# Altium PCB reciever_v1.PcbDoc
Units mm, origin at the board's own origin, x right, y up, seen from the top; angles counter-clockwise.
Board outline 22 x 75 mm, 2 copper layers (Top Layer, Bottom Layer); 27 components, 25 nets, 193 pads, 38 vias.
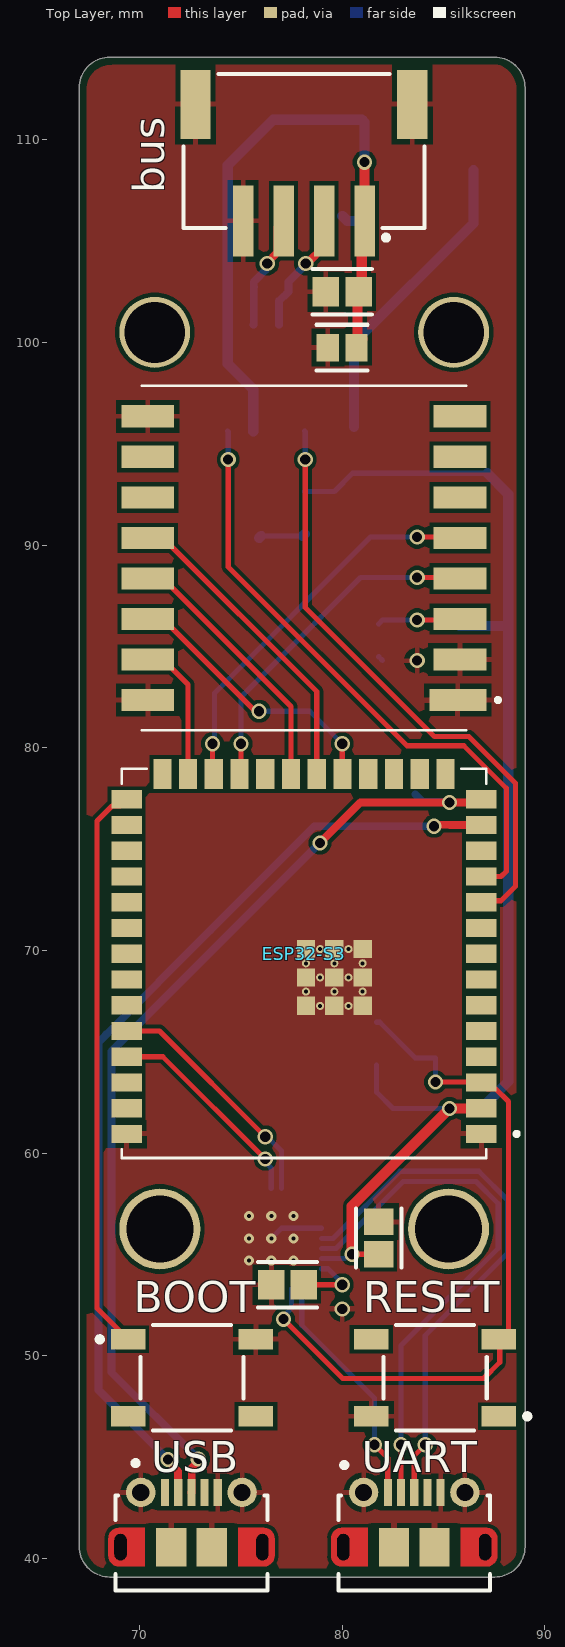
[diagram p0: Top Layer view]
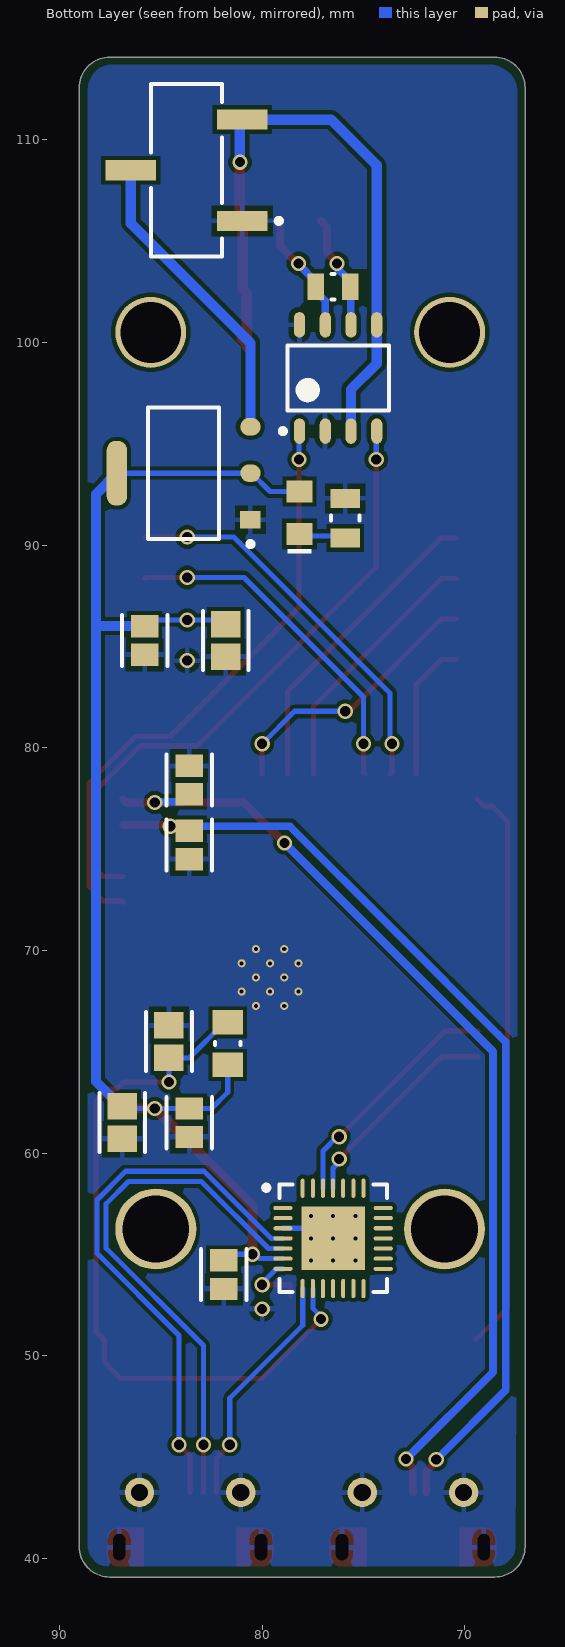
[diagram p1: Bottom Layer view, seen from below]
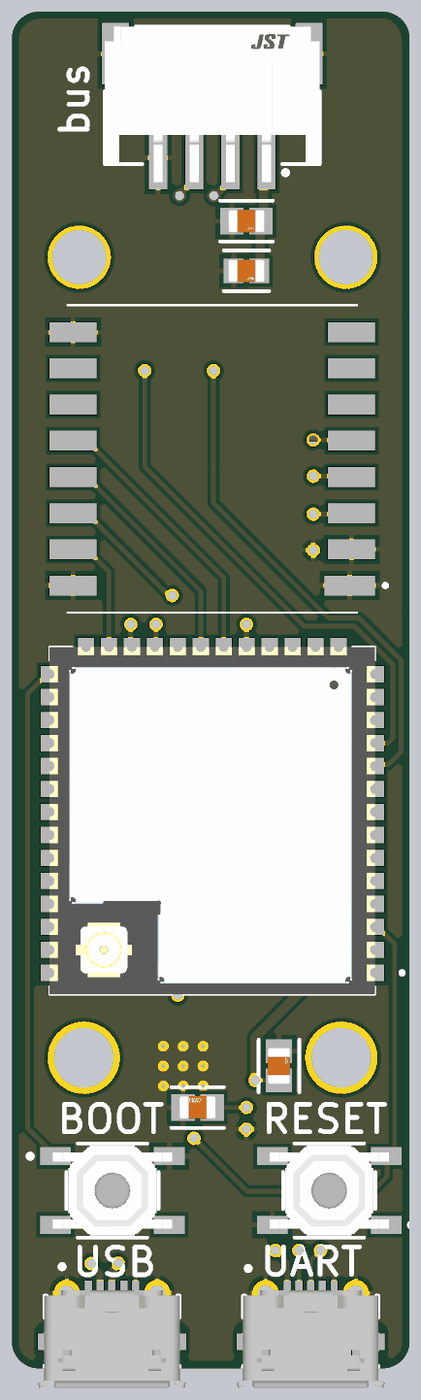
[diagram p2: 3D render of the assembled board from above, using the file's embedded part models]
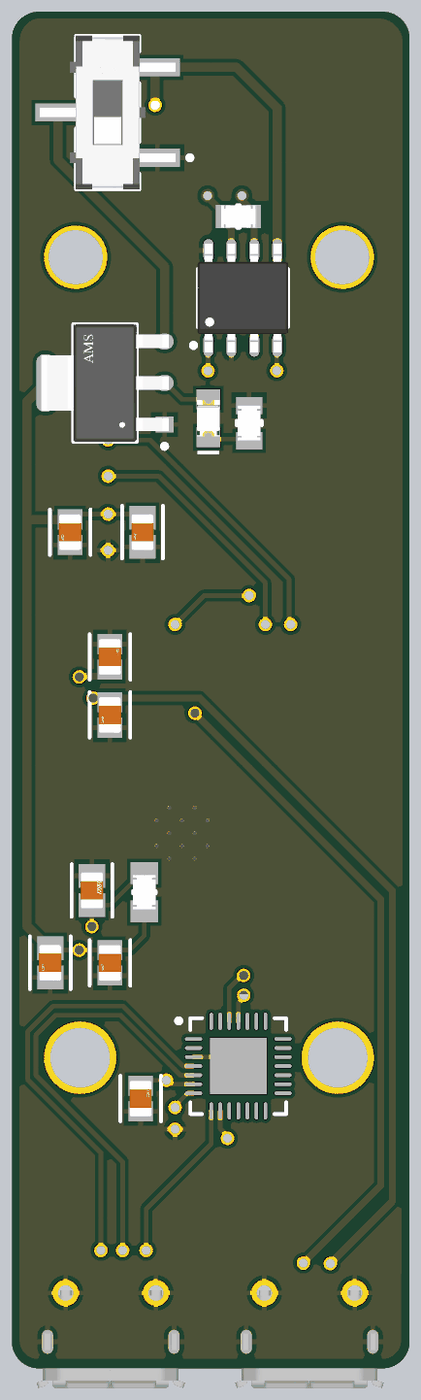
[diagram p3: 3D render of the assembled board from below, using the file's embedded part models]

## Layer stack, top to bottom
Top Solder: solder mask 0.0102, Solder Resist, Dk 3.5
Top Layer: signal copper 0.0356
Dielectric 1: dielectric 0.32, FR-4, Dk 4.8
Bottom Layer: signal copper 0.0356
Bottom Solder: solder mask 0.0102, Solder Resist, Dk 3.5

## Board outline
67.025,40.575 67.025,112.575 cw(c68.525,112.575) 68.525,114.075 87.525,114.075 cw(c87.525,112.575) 89.025,112.575 89.025,40.575 cw(c87.525,40.575) 87.525,39.075 68.525,39.075 cw(c68.525,40.575)

## Design rules (kind name [scope] priority, off if disabled: settings)
Clearance [All] p1: gap=0.2 ignorepadtopadclearanceinfootprint=TRUE
DiffPairsRouting [All] p1: maxlimit=0.254 minlimit=0.254 mostfreqgap=0.254 toplayer_minwidth=0.381 toplayer_maxwidth=0.381 toplayer_prefwidth=0.381 bottomlayer_minwidth=0.381 bottomlayer_maxwidth=0.381 bottomlayer_prefwidth=0.381 maxuncoupledlength=12.7
HoleSize [All] p1: absolutevalues=TRUE maxlimit=6.3 minlimit=0.2 maxpercent=80.000 minpercent=20.000
MinimumSolderMaskSliver [All] p1: minsoldermaskwidth=0.05
PolygonConnect [All] p1: connectstyle=Relief reliefconductorwidth=0.254 reliefentries=4 polygonreliefangle="90 Angle" airgapwidth=0.254
RoutingVias [All] p1: holewidth=0.711 width=1.27 viastyle="Through Hole" minholewidth=0.3 minwidth=0.4 maxholewidth=0.711 maxwidth=1.27
SilkToSolderMaskClearance [IsPad] p1: minsilkscreentomaskgap=0.15 clearancetoexposedcopper=TRUE
SolderMaskExpansion [All] p1: expansion=0.05 istentingtop=FALSE
SupplyNets "Schematic Supply Nets" [InNet('GND')] p1: voltage=0.000
Width [All] p1: maxlimit=0.508 minlimit=0.254 preferedwidth=0.254
26 further rules are at their usual default settings.

## Classes and differential pairs
component class reciever_v1: BOOT bus RESET UART
differential pair CAN: +CAN_+ -CAN_-
differential pair D: +D_+ -D_-

## Components (designator, comment, footprint, x,y, rotation, side; value= is the part's Value field where it differs from the comment)
BOOT "IO0" FP-8-1437565-1-MFG 72.585,48.907 r0 top
bus "S4B-PH-SM4-TB" FP-S4B-PH-SM4-TB-MFG 78.11,109.45 r0 top
C1 "0.1uF" FP-0805-L_2_01_0_2-W_1_25-IPC_C 83.6,61.494 r270 bottom
C2 "22uF" FP-0805-L_2_01_0_2-W_1_25-IPC_B 86.9,61.5 r270 bottom
C3 "22uF" FP-0805-L_2_01_0_2-W_1_25-IPC_B 81.8,85.3 r270 bottom
C4 "0.1uF" FP-0805-L_2_01_0_2-W_1_25-IPC_C 85.8,85.3 r270 bottom
C5 "1uF" FP-0805-L_2_01_0_2-W_1_25-IPC_B 84.6,65.5 r90 bottom
C6 "0.1uF" FP-0805-L_2_01_0_2-W_1_25-IPC_C 83.6,78.406 r90 bottom
C7 "0.1uF" FP-0805-L_2_01_0_2-W_1_25-IPC_C 83.6,75.2 r270 bottom
C8 "1uF" FP-0805-L_2_01_0_2-W_1_25-IPC_B 77.3,53.5 r180 top
C9 "22uF" FP-0805-L_2_01_0_2-W_1_25-IPC_B 81.8,55.8 r90 top
C10 "0.1uF" FP-0805-L_2_01_0_2-W_1_25-IPC_C 81.9,53.994 r90 bottom
C11 "0.1uF" FP-0805-L_2_01_0_2-W_1_25-IPC_C 80,99.75 r0 top
C12 "22uF" FP-0805-L_2_01_0_2-W_1_25-IPC_B 80,102.5 r0 top
CAN_controller "TJA1051T/3,118" NXP-SOIC-8_L 76.25,98.25 r90 bottom
CP2102 "CP2102-GMR" SLAB-QFN-28-3125x3125TP_M 76.5,55.787 r180 bottom
D_PWR "150080BS75000" WL-SMCW_0805_150080xx75000 78.155,91.6 r90 bottom
ESP32-S3 "ESP32-S3-WROOM-1U-N16R8" XCVR_ESP32-S3-WROOM-1U-N16R8 78.11,69.354 r180 top
LDO "AMS1117-3.3" FP-AMS1117-IPC_C 83.875,93.55 r0 bottom
LoRa "RA-02_LORA" MODULE_RA-02_LORA 78.11,89.355 r180 top
R1 "10k" FP-CRCW0805-e3-IPC_A 81.7,65.4 r90 bottom
R2 "1k" FP-CRCW0805-e3-MFG 75.9,91.33 r90 bottom
Rcan "CRCW0805120RFKEA" FP-CRCW0805-e3-IPC_C 76.5,102.75 r180 bottom
RESET "EN" FP-8-1437565-1-MFG 84.582,48.907 r180 top
SW_PWR "JS102011SCQN" FP-JS102011SCQN-MFG 83.729,108.5 r90 bottom
UART "105017-0001" USB-MICRO-B_V 83.555,41.9 r0 top
USB "105017-0001" USB-MICRO-B_V 72.56,41.9 r0 top (schematic designator "USB micro B")

## Footprints (in the part's own frame and the unit in brackets; to place one, negate y for a bottom-side part, rotate by r counter-clockwise, add the part's x,y. Pads: shape width x height; smd on the part's side, far side on the other; paste and mask are expansions set on the pad)
FP-8-1437565-1-MFG [mm]
  rect 1.7x1 smd paste+0 mask+0: 1(-3.15,1.9) 2(3.15,1.9) 3(-3.15,-1.9) 4(3.15,-1.9)
  silkscreen extent -4.67,-2.6 2.55,2.6, body extent -4.1,-2.7 4.1,2.7, height 0.25
FP-0805-L_2_01_0_2-W_1_25-IPC_B [mm]
  rect 1.305x1.456 smd paste+0 mask+0: 1(-0.806,0) 2(0.806,0)
  silkscreen extent -1.46,-1.13 1.46,1.13, body extent -1,-0.63 1,0.63, height 1.52
FP-0805-L_2_01_0_2-W_1_25-IPC_C [mm]
  rect 1.105x1.356 smd paste+0 mask+0: 1(-0.706,0) 2(0.706,0)
  silkscreen extent -1.26,-1.12 1.26,1.12, body extent -1,-0.63 1,0.63, height 0.94
FP-AMS1117-IPC_C [mm]
  rect 1.004x0.872 smd paste+0 mask+0: 1(-3.295,2.29)
  rrect100% 1.004x0.872 smd paste+0 mask+0: 2(-3.295,0) 3(-3.295,-2.29)
  rrect87% 1.004x3.182 smd paste+0 mask+0: 4(3.295,0)
  silkscreen extent -3.42,-3.25 1.75,3.62, body extent -3.53,-3.25 3.53,3.25, height 1.8
FP-CRCW0805-e3-IPC_A [mil]
  rect 47.5x59.38 smd paste+0 mask+0: 1(-41.37,0) 2(41.37,0)
  silkscreen extent -3,-25 3,25, body extent -39,-25 39,25, height 20
FP-CRCW0805-e3-IPC_C [mil]
  rect 31.75x51.5 smd paste+0 mask+0: 1(-33.5,0) 2(33.5,0)
  silkscreen extent -3,-25 3,25, body extent -39,-25 39,25, height 20
FP-CRCW0805-e3-MFG [mm]
  rect 0.95x1.45 smd paste+0 mask+0: 1(-0.975,0) 2(0.975,0)
  silkscreen extent -0.13,-0.7 0.13,0.7, body extent -1,-0.63 1,0.63, height 0.5
FP-JS102011SCQN-MFG [mm]
  rect 1x2.5 smd paste+0 mask+0: 1(-2.5,-2.75) 2(0,2.75) 3(2.5,-2.75)
  silkscreen extent -4.25,-4.67 4.25,1.75, body extent -4.25,-3.75 4.25,3.75, height 5.5
FP-S4B-PH-SM4-TB-MFG [mm]
  rect 1x3.5 smd: 1(3,-3.45) 2(1,-3.45) 3(-1,-3.45) 4(-3,-3.45)
  rect 1.5x3.4 smd: 5(-5.35,2.3) 6(5.35,2.3)
  silkscreen extent -5.95,-4.4 5.95,3.8, body extent -6.2,-5.3 6.2,4.1, height 0.25
MODULE_RA-02_LORA [mm]
  rect 2.8x1.1 smd: 1(-7.6,7)
  rect 2.6x1.1 smd: 2(-7.7,5) 3(-7.7,3) 4(-7.7,1) 5(-7.7,-1) 6(-7.7,-3) 7(-7.7,-5) 8(-7.7,-7) 9(7.7,-7) 10(7.7,-5) 11(7.7,-3) 12(7.7,-1) 13(7.7,1) 14(7.7,3) 15(7.7,5) 16(7.7,7)
  silkscreen extent -9.68,-8.5 8,8.5
NXP-SOIC-8_L [mm] "SOIC, 8-Leads, Body 5x4mm, Pitch 1.27mm, IPC High Density"
  oval 1.25x0.55 smd: 1(-2.625,1.905) 2(-2.625,0.635) 3(-2.625,-0.635) 4(-2.625,-1.905) 5(2.625,-1.905) 6(2.625,-0.635) 7(2.625,0.635) 8(2.625,1.905)
  silkscreen extent -2.75,-2.5 1.6,2.86, body extent -3,-2.5 3,2.5, height 1.75
SLAB-QFN-28-3125x3125TP_M [mm] "QFN, 28-Leads, Body 5x5mm, Pitch 0.5mm, Thermal Pad 3.13x3.13mm, IPC Low Density"
  oval 0.95x0.2 smd: 1(-2.475,1.5) 2(-2.475,1) 3(-2.475,0.5) 4(-2.475,0) 5(-2.475,-0.5) 6(-2.475,-1) 7(-2.475,-1.5) 15(2.475,-1.5) 16(2.475,-1) 17(2.475,-0.5) 18(2.475,0) 19(2.475,0.5) 20(2.475,1) 21(2.475,1.5)
  oval 0.2x0.95 smd: 8(-1.5,-2.475) 9(-1,-2.475) 10(-0.5,-2.475) 11(0,-2.475) 12(0.5,-2.475) 13(1,-2.475) 14(1.5,-2.475) 22(1.5,2.475) 23(1,2.475) 24(0.5,2.475) 25(0,2.475) 26(-0.5,2.475) 27(-1,2.475) 28(-1.5,2.475)
  rect 3.13x3.13 smd: 29(0,0)
  silkscreen extent -3.42,-2.65 2.65,2.65, body extent -2.5,-2.5 2.5,2.5, height 1
USB-MICRO-B_V [mm] "USB, MICRO B, Body 7.491x4.695 mm, Pitch 0.65 mm"
  rect 0.4x1.35 smd: 1(-1.3,1.35) 2(-0.65,1.35) 3(0,1.35) 4(0.65,1.35) 5(1.3,1.35)
  round 1.45 hole 0.85: 6(-2.5,1.35) 7(2.5,1.35)
  rrect50% 0x0 hole 0.6 slot 1.3 at 90 deg: 8(-3.5,-1.35) 11(3.5,-1.35)
  rect 1.5x1.9 smd: 9(-1,-1.35) 10(1,-1.35)
  Top Layer circle w0.5: c3.6,-0.9 r0.25
  Top Layer circle w0.5: c3.6,-1.8 r0.25
  Top Layer circle w0.5: c-3.6,-0.9 r0.25
  Top Layer circle w0.5: c-3.6,-1.8 r0.25
  Top Layer region: -2.3,-2.3 -2.3,-0.4 -3.6,-0.4 -3.6,-2.3
  Top Layer region: 2.3,-0.4 2.3,-2.3 3.6,-2.3 3.6,-0.4
  Top Layer region: 3.6,-0.9 3.6,-1.8 4.1,-1.8 4.1,-0.9
  Top Layer region: -3.6,-1.8 -3.6,-0.9 -4.1,-0.9 -4.1,-1.8
  silkscreen extent -3.75,-3.5 3.75,2.82, body extent -4.1,-3.9 4.1,1.5, height 2.67
WL-SMCW_0805_150080xx75000 [mm] "SMD Mono-color Chip LED, body 2.0x1.25mm"
  rect 1.1x1.3 smd: 1(-1.05,0) 2(1.05,0)
  silkscreen extent -2,-0.6 -1.8,0.6, body extent -1,-0.63 1,0.62, height 0.7
XCVR_ESP32-S3-WROOM-1U-N16R8 [mm]
  rect 1.5x0.9 smd: 1(-8.75,8.41) 2(-8.75,7.14) 3(-8.75,5.87) 4(-8.75,4.6) 5(-8.75,3.33) 6(-8.75,2.06) 7(-8.75,0.79) 8(-8.75,-0.48) 9(-8.75,-1.75) 10(-8.75,-3.02) 11(-8.75,-4.29) 12(-8.75,-5.56) 13(-8.75,-6.83) 14(-8.75,-8.1) 27(8.75,-8.1) 28(8.75,-6.83) 29(8.75,-5.56) 30(8.75,-4.29) 31(8.75,-3.02) 32(8.75,-1.75) 33(8.75,-0.48) 34(8.75,0.79) 35(8.75,2.06) 36(8.75,3.33) 37(8.75,4.6) 38(8.75,5.87) 39(8.75,7.14) 40(8.75,8.41)
  rect 0.9x1.5 smd: 15(-6.985,-9.35) 16(-5.715,-9.35) 17(-4.445,-9.35) 18(-3.175,-9.35) 19(-1.905,-9.35) 20(-0.635,-9.35) 21(0.635,-9.35) 22(1.905,-9.35) 23(3.175,-9.35) 24(4.445,-9.35) 25(5.715,-9.35) 26(6.985,-9.35)
  rect 0.9x0.9 smd: 41_1(-2.9,2.09) 41_2(-1.5,2.09) 41_3(-0.1,2.09) 41_4(-2.9,0.69) 41_5(-1.5,0.69) 41_6(-0.1,0.69) 41_7(-2.9,-0.71) 41_8(-1.5,-0.71) 41_9(-0.1,-0.71)
  round 0.4 hole 0.2 mask+0: 41_10(-2.2,2.09) 41_11(-0.8,2.09) 41_12(-2.9,1.39) 41_13(-1.5,1.39) 41_14(-0.1,1.39) 41_15(-2.2,0.69) 41_16(-0.8,0.69) 41_17(-2.9,-0.01) 41_18(-1.5,-0.01) 41_19(-0.1,-0.01) 41_20(-2.2,-0.71) 41_21(-0.8,-0.71)
  silkscreen extent -10.6,-9.6 9,9.6, body extent -9,-9.6 9,9.6, height 3.35

## Part data
BOOT RESET: library part CMP-03407-000016-1, "SWITCH TACTILE SPST-NO 0.02A 15V", Case/Package=SMD/SMT, Contact Current Rating=20mA, Contact Resistance=100mR, Max Operating Temperature=85°C, Max Voltage Rating (DC)=15V, Min Operating Temperature=-35°C, Operating Force=1.57N, Package Quantity=4000, Actuator Length=0.4mm, Actuator Material=Brass, Actuator Type=Standard, Contact Material="Copper Alloy", Contact Plating=Silver, Electrical Life=500000Cycles, ELV=Compliant, Illumination Type=Non-Illuminated, Max Current Rating=20mA, Mechanical Life=500000Cycles, Mount="Surface Mount", Orientation=Straight, Packaging="Tape and Reel", Radiation Hardening=No, RoHS Compliant=Yes, Series=FSMCT, Switch Function=Off-Mom, Switch Travel=0.25mm, Termination="Gull Wing", Throw Configuration=SPST, Type=Switch, Voltage Rating (DC)=15V
bus: library part CMP-00504-08293667-1, "S4B-PH-SM4-TB Header S4B-PH-SM4-TB, 2.00mm, 4-contacts, side entry, SMT, /1000/reel", Contact Resistance=20mΩ, Current Rating=2A, Housing Color=Beige, Max Operating Temperature=85°C, Max Voltage Rating (AC)=100V, Min Operating Temperature=-25°C, Contact Material="Copper, Tin", Contact Plating="Copper, Tin", Depth=7.6mm, Gender=Male, Height=5.5mm, Housing Material=Polyamide, Length=11.9mm, Max Current Rating=2A, Max Voltage Rating (DC)=100V, Number of Contacts=4, Number of Pins=4, Number of Rows=1, Packaging="Tape and Reel", Pitch=2mm, RoHS=Non-Compliant, Termination=Solder, Voltage Rating=100V
C1 C4 C6 C7 C10 C11: library part CMP-2000-05016-2, "General Purpose Ceramic Capacitor, 0805, 100nF, 10%, X7R, 0.15, 50V", Capacitance=100nF, Case Code (Imperial)=0805, Case Code (Metric)=2012, Dielectric=X7R, Dielectric Material=Ceramic, Insulation Resistance=100GR, Max Operating Temperature=125°C, Min Operating Temperature=-55°C, Package Quantity=4000, Tolerance=10%, Voltage=50V, Case/Package=0805, Depth=1.25mm, Dissipation Factor=2.5%, Height=0.5mm, Lead Free="Lead Free", Length=2mm, Mount="Surface Mount", Number of Pins=2, Packaging="Cut Tape", Radiation Hardening=No, REACH SVHC="No SVHC", RoHS Compliant=Yes, Series="MLCC X7R", Termination=Standard, Thickness=0.037inch, Voltage Rating=50V, Voltage Rating (DC)=50V, Weight=0.001411oz, Width=1.2mm
C2 C3 C9 C12: library part CMP-1036-04939-3, "General Purpose Ceramic Capacitor, 0805, 22uF, 20%, X5R, 15%, 6.3V", Case Code (Imperial)=0805, Case Code (Metric)=2012, Dielectric=X5R, Dielectric Material=Ceramic, Insulation Resistance=10GR, Max Operating Temperature=85°C, Min Operating Temperature=-55°C, Package Quantity=1, Tolerance=20%, Voltage=6.3V, Capacitance=22uF, Case/Package=0805, Depth=1.25mm, Dissipation Factor=12.5%, Height=1.4mm, Lead Free="Lead Free", Length=2.01mm, Mount="Surface Mount", Number of Pins=2, Packaging="Tape and Reel", Radiation Hardening=No, REACH SVHC="No SVHC", RoHS Compliant=Yes, Termination=SMD/SMT, Thickness=0.055inch, Voltage Rating=6.3V, Voltage Rating (DC)=6.3V, Width=0.049inch
C5 C8: library part CMP-2007-04599-2, "General Purpose Ceramic Capacitor, 0805, 1uF, 10%, X7R, 15%, 25V", Case Code (Imperial)=0805, Case Code (Metric)=2012, Dielectric=X7R, Max Operating Temperature=125°C, Min Operating Temperature=-55°C, Package Quantity=1, Temperature Coefficient=30ppm/°C, Tolerance=10%, Voltage=25V, Capacitance=1uF, Case/Package=0805, Construction=Flat, Contact Plating=Tin, Depth=1.25mm, Features="Soft Termination", Height=1.4mm, Lead Free="Lead Free", Length=2.01mm, Mount="Surface Mount", Number of Pins=2, Packaging="Tape and Reel", Radiation Hardening=No, REACH SVHC="No SVHC", RoHS Compliant=Yes, Series=FLEXITERM®, Termination=SMD/SMT, Thickness=0.055inch, Voltage Rating=25V, Voltage Rating (DC)=25V, Width=1.25mm
CAN_controller: library part CMP-2000-07245-1, "High-Speed CAN Transceiver, 3 to 5 V, 8-Pin SOIC (SOT96-1), RoHS, Tape and Reel", Manufacturer=NXP, Operating Supply Voltage (Max)=5.5V, Operating Supply Voltage (Min)=4.5V, Operating Supply Voltage (Typ)=5V, Operating Temperature (Max)=125C, Operating Temperature (Min)=-40C, Operating Temperature Classification=Automotive, Package Description="8-Pin Small Outline Integrated Circuit, Body 4.9 x 3.9 mm, Pitch 1.27 mm", Package Reference=SOT96-1, Package Type=SO, Power Down Mode=Normal/Silent, Supply Current=70mA, Category=Transceiver, Data Rate=1Mbps, Datasheet URL=http://www.nxp.com/documents/data_sheet/TJA1051.pdf, Datasheet Version="Rev. 7, 01/2015", DELETED=Compliant, Manufacturer URL=http://www.nxp.com/, Mounting=SurfaceMount, Mounting Technology=SurfaceMount, Number of Transceivers=1, Packaging=TapeandReel, Pin Count=8, Rad Hardened=No, Standard Supported=ISO11898-2
CP2102: library part CMP-2000-04924-1, "Single-Chip USB to URAT Bridge, 3.3 V, -40 to 85 degC, 28-Pin QFN, RoHS, Tape and Reel", Manufacturer="Silicon Labs", Operating Supply Voltage (Max)=3.6V, Operating Supply Voltage (Min)=3V, Operating Supply Voltage (Typ)=3.3V, Operating Temperature (Max)=85C, Operating Temperature (Min)=-40C, Operating Temperature Classification=Industrial, Package Description="28-Pin Quad-Flat No-Leads Package, Body 5 x 5 mm, Pitch 0.5 mm", Package Reference=QFN-28, Package Type=QFNEP, Supply Current=26mA, Data Rate=1000kbps, Datasheet URL=http://www.mouser.com/ds/2/368/CP2102-9-247052.pdf, Datasheet Version="Rev. 1.6, 12/2013", Interface Circuit Standard 1=RS-232, Manufacturer URL=http://www.silabs.com/, Mounting=SurfaceMount, Number Of Channels=1, Package URL=http://www.silabs.com/Support%20Documents/TechnicalDocs/C8051T61x.pdf, Packaging=TapeandReel, Pin Count=28, Rad Hardened=No, Transmitter and Receiver FIFO Counter=No
D_PWR: library part CMP-1426-00008-7, "Led, Blue, 470 Nm, 3.2 V, 30 Ma, 145 Mcd Rohs Compliant: Yes", Case Code (Imperial)=0805, Case Code (Metric)=2012, Color=Blue, Forward Current=100mA, Forward Voltage=3.2V, Max Junction Temperature (Tj)=95°C, Max Operating Temperature=85°C, Max Reverse Voltage (DC)=5V, Min Operating Temperature=-40°C, Power Dissipation=105mW, Test Current=20mA, Case/Package=0805, Dominant Wavelength=470nm, Height=700µm, Lead Free="Lead Free", Length=2mm, Lens Style="Clear, Rectangular", Luminous Intensity=145mcd, Mount="Surface Mount", Packaging="Tape and Reel", Peak Wavelength=465nm, REACH SVHC=Unknown, Reverse Voltage=5V, RoHS=Compliant, Viewing Angle=140°, Wavelength=470nm, Width=1.25mm
ESP32-S3: "Bluetooth, WiFi 802.11b/g/n, Bluetooth v5.0 Transceiver Module 2.4GHz Antenna Not Included, U.FL Surface Mount", Package=None, Availability=Unavailable, Check_prices=https://www.snapeda.com/parts/ESP32-S3-WROOM-1U-N16R8/Espressif+Systems/view-part/?ref=eda, MF="Espressif Systems", MP=ESP32-S3-WROOM-1U-N16R8, Price=None, SnapEDA_Link=https://www.snapeda.com/parts/ESP32-S3-WROOM-1U-N16R8/Espressif+Systems/view-part/?ref=snap
LDO: library part CMP-209535-000001-1, "LDO Voltage Regulators 1A, 3.3V", Dropout Voltage=1.1V, Manufacturer="Advanced Monolithic Systems", Max Junction Temp=+125°C, Max Power Dissipation=1.2W, Max Supply Voltage=15V, Nominal Supply Current=5mA, Output Current=1A, Output Voltage=3.3V, Package=AMS1117, Temperature="-40°C to +125°C", Temperature Range Low=-40°C, Automotive=No, Category=IC, ComponentLink2Description=Datasheet, ComponentLink2URL=http://www.advanced-monolithic.com/pdf/ds1117.pdf, Device Class L1="Integrated Circuits (ICs)", Device Class L2="Power Management ICs", Device Class L3="Voltage Regulators - Linear", Height=1.8mm, Ipc Land Pattern Name=SOT229P700X180-4, Lead Free=Yes, Manufacturer Part Number=AMS1117-3.3, Number Of Outputs=1, Octopart=https://octopart.com/ams1117-3.3-advanced+monolithic+systems-25899300, Output Type=Fixed, RoHS=TRUE, Standoff Height=0.64mm, Temperature Range High=+125°C
LoRa: "Ra-02 LoRa RF M5Stack Platform Evaluation Expansion Board", Package=None, Availability=Unavailable, MP=RA-02_LORA, Price=None
R1: library part CMP-2001-04908-2, "RES Thick Film, 10kΩ, 1%, 0.125W, 100ppm/°C, 0805", Case Code (Imperial)=0805, Case Code (Metric)=2012, Max Operating Temperature=155°C, Min Operating Temperature=-55°C, Package Quantity=5000, Power Rating=125mW, Resistance=10kR, Temperature Coefficient=100ppm/°C, Tolerance=1%, Voltage Rating=150V, Case/Package=0805, Composition="Thick Film", Contact Plating=Tin, Depth=1.25mm, Height=0.45mm, Lead Free="Lead Free", Length=2mm, Military Standard=Not, Packaging="Tape and Reel", Radiation Hardening=No, Termination=SMD/SMT, Voltage Rating (DC)=150V, Weight=0.000194oz, Width=1.25mm
R2: library part CMP-2001-03607-2, "RES Thick Film, 1.2kΩ, 1%, 0.125W, 100ppm/°C, 0805", Case Code (Imperial)=0805, Case Code (Metric)=2012, Max Operating Temperature=155°C, Max Power Dissipation=125mW, Min Operating Temperature=-55°C, Package Quantity=10, Resistance=1.2kR, Temperature Coefficient=100ppm/°C, Tolerance=1%, Voltage Rating=150V, Case/Package=0805, Composition="Thick Film", Contact Plating=Tin, Depth=1.25mm, Features="Automotive AEC-Q200", Height=0.45mm, Lead Free="Lead Free", Length=2mm, Military Standard=Not, Number of Terminations=2, Packaging="Tape and Reel", Power Rating=125mW, Radiation Hardening=No, Termination=SMD/SMT, Voltage Rating (DC)=150V, Weight=0.000194oz, Width=0.049inch
Rcan: library part CMP-02407-007854-1, "RES Thick Film, 120Ω, 1%, 0.125W, 100ppm/°C, 0805", Case Code (Imperial)=0805, Case Code (Metric)=2012, Max Operating Temperature=155°C, Max Power Dissipation=125mW, Min Operating Temperature=-55°C, Package Quantity=10, Resistance=120R, Temperature Coefficient=100ppm/°C, Tolerance=1%, Voltage Rating=150V, Case/Package=0805, Composition="Thick Film", Contact Plating=Tin, Depth=1.25mm, Features="Automotive AEC-Q200", Height=0.45mm, Lead Free="Lead Free", Length=2mm, Military Standard=Not, Mount="Surface Mount", Number of Terminations=2, Packaging="Tape and Reel", Power Rating=125mW, Radiation Hardening=No, Termination=SMD/SMT, Voltage Rating (DC)=150V, Weight=0.000194oz, Width=1.25mm
SW_PWR: library part CMP-10038-000023-1, "SWITCH SLIDE SPDT 300MA 6V", Actuator Color=Black, Case/Package=SMD/SMT, Contact Resistance=70mR, Current Rating=300mA, Max Operating Temperature=85°C, Max Voltage Rating (DC)=30V, Min Operating Temperature=-40°C, Package Quantity=4000, Voltage Rating (DC)=6V, Actuator Length=2mm, Actuator Material=Nylon, Actuator Type=Standard, Contact Material="Copper Alloy", Contact Plating=Silver, Depth=7.5mm, Electrical Life=5000Cycles, Housing Material=Nylon, Length=8.5mm, Max Current Rating=300mA, Mount="Surface Mount", Orientation=Straight, Packaging="Tape and Reel", Radiation Hardening=No, RoHS Compliant=Yes, Series=JS, Switch Function=On-On, Switch Travel=2mm, Termination="Gull Wing", Throw Configuration=SPDT
UART USB: library part CMP-2000-05827-1, "Micro-USB B Receptacle, Right Angle, Bottom Mount, Surface Mount, with Solder Tabs, -30 to 85 degC, 5-Pin USB, RoHS, Tape and Reel", Manufacturer=Molex, Package Description="5-Leads USB, Micro B, Body 7.5 x 5 mm, Pitch 0.65 mm", Package Reference=MICRO-B, Package Version="Rev. F, 12/2012", Standard Package=1, Voltage - Max=30V, 3D Model=105017-0001.stp, Catalog Drawings=1050170001, Category=Connectors,Interconnects, Circuits=5, Connector Type=USB-microB, Datasheet URL=http://www.molex.com/elqNow/elqRedir.htm?ref=http://www.molex.com/webdocs/datasheets/pdf/en-us/1050170001_IO_CONNECTORS.pdf, Datasheet Version=03/2016, Family=USB,DVI,HDMIConnectors, Featured Product=Micro-USBConnectorsUSBConnectors, Features=Shielded,SolderRetention, Gender=Receptacle, Ingress Protection=-, Manufacturer URL=http://www.molex.com/, Mating Products=WM17145-ND-CABLEMICROUSBBTOSTDA1.0MWM17147-ND-CABLEMICROUSBBTOSTDA2.0MWM17146-ND-CABLEMICROUSBBTOSTDA1.5M, Mounting Technology=SurfaceMount, Mounting Type=BoardCutout,SurfaceMount,RightAngle, Number of Contacts=5, Online Catalog=Molex-MicroUSB, Other Names=WM1399DKR, Package URL=http://www.molex.com/pdm_docs/sd/1050170001_sd.pdf, Packaging=Digi-Reel®, PCN Assembly/Origin=ResinSupplier21/Oct/2015, RoHS Information=1050170001CertofCompliance, Series=-, Specifications=-

## Free pads (board coordinates)
  round 4 hole 3.3: MH(71,56.25) MH1(85.25,56.25)
  round 3.5 hole 3: MH2(70.75,100.5) MH3(85.5,100.5)

## Via types
v1: diameter 0.75, hole 0.5, Top Layer to Bottom Layer, 29 vias
v2: diameter 0.5, hole 0.2, Top Layer to Bottom Layer, 9 vias

## Nets (pads, with @x,y where several pads share a name; then routed paths per layer and width w, separated by ;. In a path a pad name is that pad's centre, name@x,y a point inside that pad or via, vN(x,y) a via of type N, cw(c..) or ccw(c..) an arc to the next point about the centre after c; other vN are vias at no path point)
3v3: C1.1 C2.1 C3.1 C4.1 C9.1 C10.2 CP2102.6 D_PWR.2 ESP32-S3.2 LDO.2 LDO.4 LoRa.3 R1.1 | length 73.5
  Top Layer w0.254: v1(80.478,55.004) C9.1@81.596,55.004 ; v1(83.7,86.3) 85.755,86.3 LoRa.3
  Top Layer w0.508: v1(80.478,55.004) 80.478,57.378 v1(85.3,62.2) 86.846,62.2 ESP32-S3.2 ; C9.1@81.596,55.004 C9.1@81.9,54.7
  Bottom Layer w0.254: D_PWR.2 79.614,92.65 80.514,93.55 LDO.2 LDO.4 ; CP2102.6 80.127,54.787 80.344,55.004 v1(80.478,55.004) ; v1@80.478,55 80.482,55.004 81.596,55.004 C10.2 ; R1.1 81.7,63 82.5,62.2 C1.1 v1(85.3,62.2) C2.1@86.794,62.2 ; C3.1 81.994,86.3 v1(83.7,86.3) 85.506,86.3 85.513,86.307 86.101,86.307 C4.1@85.665,86.082 ; 88.106,86.006 88.2,86.1
  Bottom Layer w0.508: C4.1 88.106,86.006 ; C2.1@86.794,62.2 C2.1 86.976,62.306 88.2,63.53 88.2,86.1 88.2,92.52 LDO.4
BOOT: BOOT.1 ESP32-S3.27 | length 28.1
  Top Layer w0.254: ESP32-S3.27 69.037,77.131 68.645,77.131 67.9,76.386 67.9,52.342 BOOT.1
CAN_+: bus.2 CAN_controller.7 Rcan.1 | length 6.1
  Top Layer w0.381: v1(78.2,103.9) 78.26,103.9 79.11,104.75 bus.2
  Bottom Layer w0.381: CAN_controller.7 76.885,102.063 77.108,102.286 77.138,102.286 77.351,102.499 Rcan.1 77.351,103.001 78.2,103.85 v1(78.2,103.9)
CAN_-: bus.3 CAN_controller.6 Rcan.2 | length 5.8
  Top Layer w0.381: v1(76.3,103.9) 76.3,103.94 76.801,104.441 76.801,105.691 bus.3
  Bottom Layer w0.381: CAN_controller.6 75.632,100.892 Rcan.2@75.632,102.733 ; Rcan.2 Rcan.2@75.632,102.733 ; v1(76.3,103.9) 76.229,103.829 76.229,103.581 75.632,102.984 Rcan.2@75.632,102.733
D_+: C6.1 ESP32-S3.14 USB.3 | length 48.9
  Top Layer w0.381: USB.3 72.57,43.26 72.57,44.47 72.9,44.8 v1(72.9,44.9) ; v1(78.9,75.3) 80.9,77.3 v1(85.3,77.3) 86.706,77.3 ESP32-S3.14
  Bottom Layer w0.381: v1(72.9,44.9) 68.609,49.19 68.609,65.009 v1(78.9,75.3) ; C6.1 83.962,77.338 85.262,77.338 v1(85.3,77.3)
D_-: C7.1 ESP32-S3.13 USB.2 | length 47.2
  Top Layer w0.381: v1(71.409,44.872) 71.409,44.772 71.901,44.281 71.901,43.26 USB.2 ; v1(84.534,76.129) 84.605,76.2 85.3,76.2 85.308,76.192 86.852,76.192 ESP32-S3.13
  Bottom Layer w0.381: v1(71.409,44.872) 67.974,48.307 67.974,49.19 67.974,65.474 68.346,65.846 73.471,70.971 78.629,76.129 83.6,76.129 v1(84.534,76.129)
GND: BOOT.2 bus.4 bus.5 bus.6 C1.2 C2.2 C3.2 C4.2 C5.2 C6.2 C7.2 C8.2 C9.2 C10.1 C11.1 C12.1 CAN_controller.2 CAN_controller.8 CP2102.3 CP2102.29 ESP32-S3.1 ESP32-S3.40 ESP32-S3.41_1 ESP32-S3.41_2 ESP32-S3.41_3 ESP32-S3.41_4 ESP32-S3.41_5 ESP32-S3.41_6 ESP32-S3.41_7 ESP32-S3.41_8 ESP32-S3.41_9 ESP32-S3.41_10 ESP32-S3.41_11 ESP32-S3.41_12 ESP32-S3.41_13 ESP32-S3.41_14 ESP32-S3.41_15 ESP32-S3.41_16 ESP32-S3.41_17 ESP32-S3.41_18 ESP32-S3.41_19 ESP32-S3.41_20 ESP32-S3.41_21 LDO.1 LoRa.1 LoRa.2 LoRa.9 LoRa.16 R2.2 RESET.2 SW_PWR.1 UART.5 UART.6 UART.7 UART.8 UART.9 UART.10 UART.11 USB.5 USB.6 USB.7 USB.8 USB.9 USB.10 USB.11 | length 4.5
  Top Layer w0.254: LoRa.2@85.755,84.3 LoRa.2
  Bottom Layer w0.254: v2(76.5,55.787) 77,56.287 CP2102.3 ; C3.2 C3.2@81.994,84.3 ; C4.2@85.506,84.3 C4.2
  Bottom Layer w0.508: SW_PWR.1@80,106.246 80.246,106 SW_PWR.1
  other v1: 80,52.3 83.7,84.3
  other v2: 75.4,54.687 76.5,54.687 77.6,54.687 75.4,55.787 77.6,55.787 75.4,56.887 76.5,56.887 77.6,56.887
NetC8_1: C8.1 CP2102.7 | length 3.4
  Top Layer w0.254: C8.1@78.6,52.912 78.6,53.469 78.631,53.5 v1(80,53.5)
  Bottom Layer w0.254: CP2102.7 79.296,54.287 80,53.583 v1(80,53.5)
NetCP2102_4: CP2102.4 UART.3 | length 27.5
  Top Layer w0.254: UART.3 83.555,45.055 v1(84.1,45.6)
  Bottom Layer w0.254: CP2102.4 79.553,55.787 82.865,59.1 86.742,59.1 88.154,57.688 88.154,55.054 84.1,51 v1(84.1,45.6)
NetCP2102_5: CP2102.5 UART.2 | length 26.8
  Top Layer w0.254: v1(82.9,45.6) 82.903,45.597 82.903,43.253 UART.2
  Bottom Layer w0.254: CP2102.5 79.695,55.287 83.007,58.6 86.6,58.6 87.7,57.5 87.7,55.3 82.9,50.5 v1(82.9,45.6)
NetCP2102_8: CP2102.8 UART.1 | length 11.8
  Top Layer w0.254: v1(81.6,45.6) 82.246,44.954 82.246,43.259 UART.1
  Bottom Layer w0.254: CP2102.8 78,51.5 81.6,47.9 v1(81.6,45.6)
NetD_PWR_1: D_PWR.1 R2.1 | length 2.3
  Bottom Layer w0.254: R2.1@75.997,90.453 D_PWR.1@78.057,90.453
  Bottom Layer w0.508: R2.1 R2.1@75.997,90.453 ; D_PWR.1@78.057,90.453 D_PWR.1
NetLDO_3: LDO.3 SW_PWR.2 | length 15.1
  Bottom Layer w0.508: LDO.3 80.58,99.98 86.479,105.879 SW_PWR.2
RESET: C5.1 CP2102.9 ESP32-S3.3 R1.2 RESET.3 | length 35.8
  Top Layer w0.254: v1(77.1,51.8) 80.026,48.874 86.974,48.874 87.774,49.674 87.774,50.754 88.2,51.18 88.2,62.536 87.576,63.161 87.183,63.161 86.844,63.5 v1(84.6,63.5)
  Bottom Layer w0.254: v1(77.1,51.8) 77.1,51.934 77.5,52.334 CP2102.9 ; R1.2 81.851,66.451 83.607,64.694 C5.1 v1(84.6,63.5)
RX1: CAN_controller.4 ESP32-S3.11 | length 30.4
  Top Layer w0.254: v1(74.373,94.228) 74.373,88.927 83.2,80.1 86,80.1 88.1,78 88.1,73.9 87.842,73.642 86.862,73.642 ESP32-S3.11
  Bottom Layer w0.254: CAN_controller.4 74.373,95.597 v1(74.373,94.228)
RXD0: CP2102.26 ESP32-S3.36 | length 11.9
  Top Layer w0.254: ESP32-S3.36 70.976,66.024 v1(76.2,60.8)
  Bottom Layer w0.254: v1(76.2,60.8) 76.3,60.8 77,60.1 CP2102.26
SPI2_DI00: ESP32-S3.24 LoRa.5 | length 19.4
  Top Layer w0.254: v1(73.6,80.2) 73.6,78.769 ESP32-S3.24 ; v1(83.7,90.4) 85.765,90.4 LoRa.5
  Bottom Layer w0.254: v1(73.6,80.2) 73.695,80.295 73.695,82.695 81.4,90.4 v1(83.7,90.4)
SPI2_MISO: ESP32-S3.21 LoRa.13 | length 13
  Top Layer w0.254: LoRa.13 71.16,88.355 77.475,82.04 ESP32-S3.21
SPI2_MOSI: ESP32-S3.19 LoRa.14 | length 13.6
  Top Layer w0.254: LoRa.14 71.16,86.355 75.62,81.895 75.805,81.895 v1(75.9,81.8) ; v1(80,80.2) 80,78.719 ESP32-S3.19
  Bottom Layer w0.254: v1(75.9,81.8) 78.4,81.8 v1(80,80.2)
SPI2_RST: ESP32-S3.23 LoRa.4 | length 17.1
  Top Layer w0.254: ESP32-S3.23 75,78.769 v1(75,80.2) ; v1(83.7,88.4) 85.765,88.4 LoRa.4
  Bottom Layer w0.254: v1(75,80.2) 75,82.5 80.9,88.4 v1(83.7,88.4)
SPI2_SCK: ESP32-S3.20 LoRa.12 | length 15.5
  Top Layer w0.254: LoRa.12 71.16,90.355 78.745,82.77 ESP32-S3.20
SPI2_SS: ESP32-S3.25 LoRa.15 | length 6.9
  Top Layer w0.254: LoRa.15 71.16,84.355 72.395,83.12 ESP32-S3.25
TX1: CAN_controller.1 ESP32-S3.10 | length 29.8
  Top Layer w0.254: v1(78.177,94.223) 78.177,86.923 84.546,80.554 86.246,80.554 88.554,78.246 88.554,73.163 87.842,72.452 86.938,72.452 ESP32-S3.10
  Bottom Layer w0.254: CAN_controller.1 78.177,95.603 v1(78.177,94.223)
TXD0: CP2102.25 ESP32-S3.37 | length 10.5
  Top Layer w0.254: ESP32-S3.37 71.146,64.754 v1(76.2,59.7)
  Bottom Layer w0.254: v1(76.2,59.7) 76.2,59.566 76.5,59.266 CP2102.25
Vin: bus.1 C11.2 C12.2 CAN_controller.3 CAN_controller.5 SW_PWR.3 | length 33.2
  Top Layer w0.508: C11.2@81.004,100.174 C11.2@80.756,99.926 ; v1(81.1,108.9) 81.105,108.895 81.105,105.995 80.958,105.848 80.958,102.652 C12.2 80.756,102.45 C11.2@80.756,99.926 ; C11.2@80.756,99.926 80.756,99.8 C11.2 80.706,99.876 C11.2@80.756,99.926
  Bottom Layer w0.508: CAN_controller.3 75.615,97.685 74.345,98.955 CAN_controller.5 74.345,108.745 76.6,111 SW_PWR.3 81.1,110.879 v1(81.1,108.9)
pads on no net: BOOT.3 BOOT.4 CP2102.1 CP2102.2 CP2102.10 CP2102.11 CP2102.12 CP2102.13 CP2102.14 CP2102.15 CP2102.16 CP2102.17 CP2102.18 CP2102.19 CP2102.20 CP2102.21 CP2102.22 CP2102.23 CP2102.24 CP2102.27 CP2102.28 ESP32-S3.4 ESP32-S3.5 ESP32-S3.6 ESP32-S3.7 ESP32-S3.8 ESP32-S3.9 ESP32-S3.12 ESP32-S3.15 ESP32-S3.16 ESP32-S3.17 ESP32-S3.18 ESP32-S3.22 ESP32-S3.26 ESP32-S3.28 ESP32-S3.29 ESP32-S3.30 ESP32-S3.31 ESP32-S3.32 ESP32-S3.33 ESP32-S3.34 ESP32-S3.35 ESP32-S3.38 ESP32-S3.39 LoRa.6 LoRa.7 LoRa.8 LoRa.10 LoRa.11 RESET.1 RESET.4 UART.4 USB.1 USB.4

## Polygon pours and split planes (outlines as drawn)
GND on Bottom Layer "NONET_L-01_P-001" (solid, pour order 3): 67.4,58.471 67.4,112.334 cw(c68.766,112.334) 67.8,113.3 cw(c68.766,112.334) 68.766,113.7 87.476,113.7 cw(c87.476,112.676) 88.2,113.4 cw(c87.234,112.434) 88.6,112.434 88.6,40.624 cw(c87.576,40.624) 88.3,39.9 cw(c87.576,40.624) 87.576,39.6 68.524,39.6 cw(c68.524,40.624) 67.5,40.619
GND on Top Layer "NONET_L-01_P-001" (solid, pour order 1): 67.4,112.598 cw(c68.639,112.482) 67.799,113.401 cw(c68.689,112.239) 68.77,113.7 87.6,113.7 cw(c87.6,112.976) 88.112,113.488 88.2,113.4 cw(c87.235,112.435) 88.6,112.434 88.6,40.383 cw(c87.918,40.383) 88.4,39.9 cw(c87.434,40.865) 87.434,39.5 68.424,39.5 cw(c68.424,40.524) 67.7,39.8 cw(c68.424,40.524) 67.4,40.524 67.4,112.376

## Silkscreen, mask and mechanical layers (free items; w line width, h text height)
Mechanical 1:
  the board outline again, w0.254

## Text inside footprints (layer, text, board x,y; h text height)
UART: Mechanical 1 "PCB EDGE" at 76.355,39 h0.3
USB: Mechanical 1 "PCB EDGE" at 65.36,39 h0.3